# Allegro board OSCILATOR4.brd
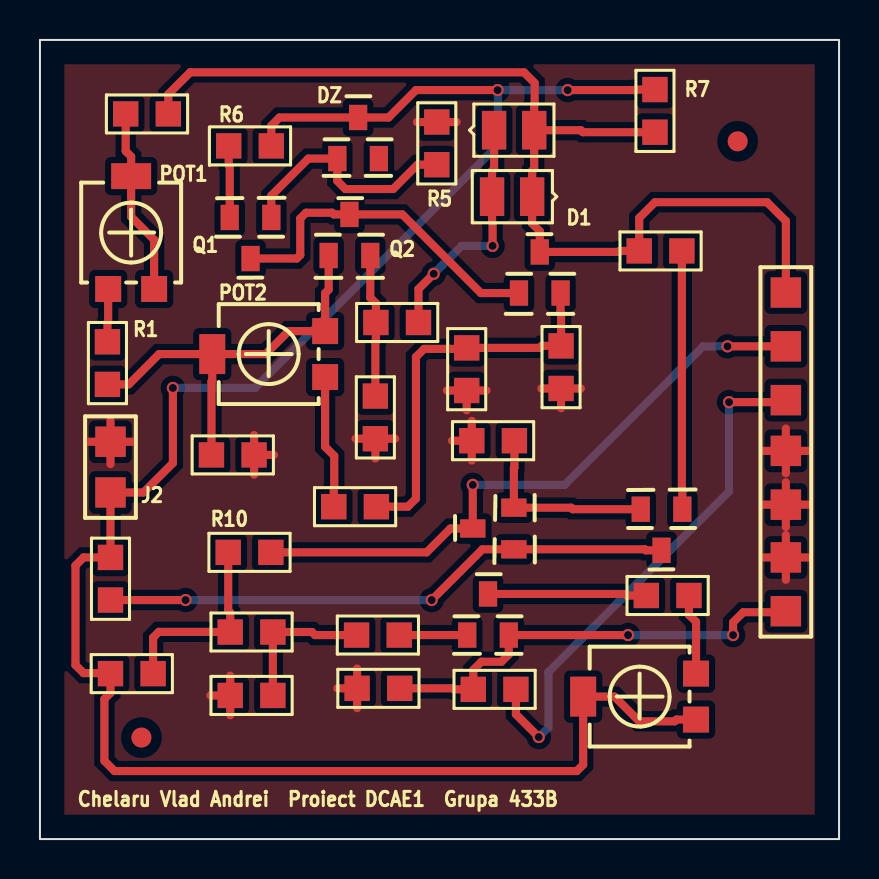
[diagram p0: board, top side]
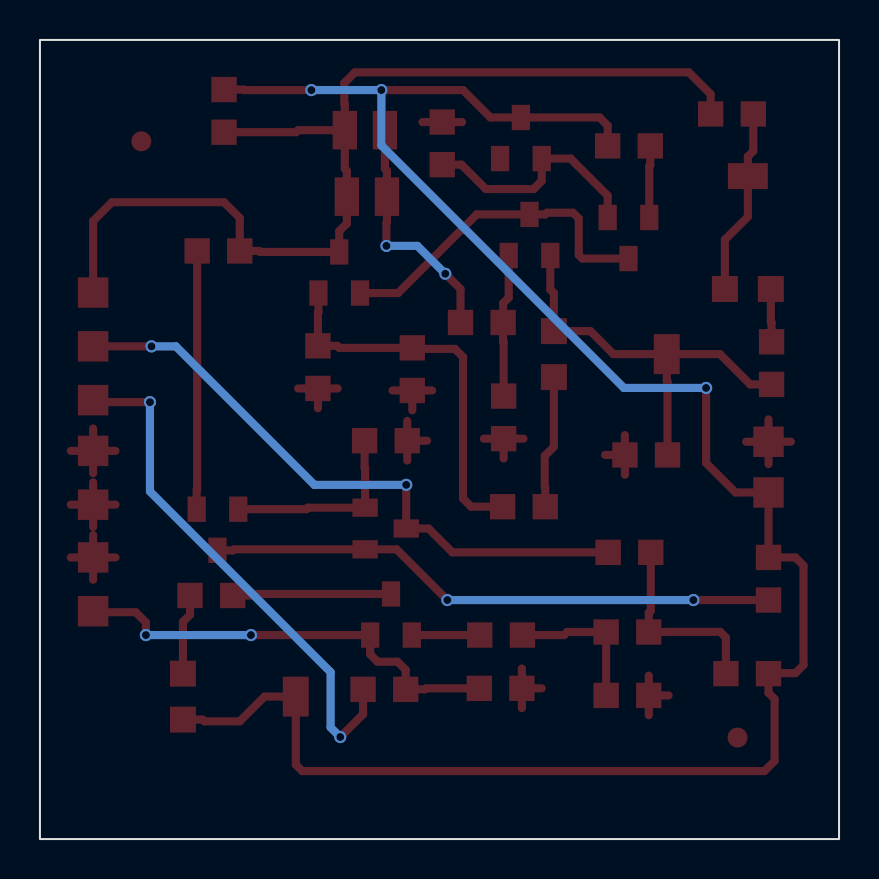
[diagram p1: board, bottom side, seen from below]

Outline 40 x 40 mm; copper layers: TOP, BOTTOM. Coordinates in mm from the lower left corner of the outline.
Outline path: rectangle 0,0 40,40

## Design rules (mm)
nets with their own width: min track width 0.406; nets GND N94313 N94383 N94397 N94495 N94501 N94547 N94637 N94669 N94751 N94757 N94781 N94831 N94841 N94865 N95013 N95079 N95085 N95089 N95235 N95241 N95307 N95407 N945811

## Placement (name value [footprint] x y rotation side)
C1  220n  [SMC0805]  4.29 36.3 0 top
C2  220n  [SMC0805]  10.72 19.23 180 top
C3  4.7u  [SMC0805]  26.09 22.56 90 top
C4  4.7u  [SMC0805]  16.81 25.86 0 top
C5  470n  [SMC0805]  9.53 7.19 0 top
C6  1n  [SMC0805]  21.69 7.49 0 top
D1  D1N4148  [SMD0805]  24.64 32.16 180 top
D2  D1N4148  [SMD0805]  22.73 35.48 0 top
DZ  BZX84C2V7  [TO236AA]  14.88 34.06 270 top
J1  LOAD  [JUMPER2]  37.34 21.97 270 top
J2  VCC  [JUMPER2]  3.53 17.35 90 top
J3  GND  [JUMPER1]  37.34 14.1 0 top
J4  GND  [JUMPER1]  37.34 16.74 0 top
J5  SIN  [JUMPER1]  37.34 27.36 0 top
J6  SQUARE  [JUMPER1]  37.34 24.66 0 top
J7  TRIANGLE  [JUMPER1]  37.34 11.4 0 top
NOREF  -  []  0 0 90 top
NOREF#2  -  []  0 40 0 top
NOREF#3  -  [unnamed#2]  34.92 34.92 0 top
NOREF#4  -  [unnamed#2]  5.08 5.08 0 top
POT1  10k  [TS53YL]  5.71 27.53 270 top
POT2  10k  [TS53YL]  14.27 25.43 0 top
POT3  10k  [TS53YL]  32.84 8.28 0 top
Q1  BC856B  [TO236AA]  11.58 31.11 90 top
Q2  BC846B  [TO236AA]  14.45 29.21 270 top
Q3  BC846B  [TO236AA]  23.98 27.33 270 top
Q4  BC846B  [TO236AA]  32.16 16.51 90 top
Q5  BC846B  [TO236AA]  23.72 14.5 0 top
Q6  BC856B  [TO236AA]  21.39 10.21 270 top
R1  100  [SMR0805]  3.38 22.76 90 top
R2  100  [SMR0805]  16.84 16.64 180 top
R3  3.3k  [SMR0805]  16.79 22.17 270 top
R4  220  [SMR0805]  21.36 22.45 90 top
R5  2.2k  [SMR0805]  19.86 35.89 270 top
R6  2k  [SMR0805]  9.45 34.7 0 top
R7  220  [SMR0805]  30.78 35.38 90 top
R8  150k  [SMR0805]  30 29.44 0 top
R9  1k  [SMR0805]  3.53 11.96 90 top
R10  4.7k  [SMR0805]  11.56 14.35 180 top
R11  1k  [SMR0805]  5.66 8.28 180 top
R12  51  [SMR0805]  21.62 19.94 0 top
R13  4.7k  [SMR0805]  11.66 10.36 180 top
R14  22k  [SMR0805]  17.98 10.21 180 top
R15  1k  [SMR0805]  30.35 12.19 0 top
R16  100k  [SMR0805]  15.88 7.54 0 top

## Library data of the parts
C1-C6 = C
D1 = D1N4148_3
D2 = D1N4148_2
DZ = BZX84C2V7_0
J1 = CON2: User Part Number: ***
J2 = CON2
J3-J7 = CON1: User Part Number: ***
POT1-POT3 = POT
Q1 Q6 = BC856B
Q2-Q5 = BC846B
R1-R16 = R

## Footprints (pads in the part's own frame, mm; a bottom-side part is the same pattern mirrored in y, then rotated)
JUMPER1
  rect 1.524x1.524 smd: 1(0,0)
JUMPER2
  rect 1.524x1.524 smd: 1(0,0) 2(2.54,0)
SMC0805
  rect 1.27x1.27 smd: 1(0,0) 2(2.134,0)
SMD0805
  rect 1.219x1.93 smd: A(2.007,0) C(0,0)
SMR0805
  rect 1.27x1.27 smd: 1(0,0) 2(2.134,0)
TO236AA
  rect 1.27x0.914 smd: 1(0,0) 2(0,2.083) 3(-2.057,1.041)
TS53YL
  rect 1.3x1.3 smd: 1(0,0) 3(0,-2.3)
  rect 1.3x2 smd: 2(-5.65,-1.15)
unnamed#2
  round 1 smd: (0,0)

## Nets
GND: C2.1 C3.1 C5.1 J1.2 J2.2 J3.1 J4.1 R3.2 R4.1 R5.1 R12.1 R16.1
N94313: DZ.3 J2.1 POT3.2(T) POT3.3 R6.2 R7.2 R9.2 R11.2
N94383: C1.2 D1.C D2.A J5.1 Q3.3 R7.1 R8.1
N94397: POT3.1 R15.2
N94495: Q6.3 R15.1
N94501: C1.1 POT1.1 POT1.2(T)
N94547: R10.2 R11.1 R13.2
N94637: C5.2 R13.1 R14.2
N94669: Q4.3 Q5.1 R9.1
N94751: Q1.2(E) R6.1
N94757: C6.1 J7.1 Q6.2(E) R16.2
N94781: POT1.3 R1.2
N94831: J6.1 Q5.3 R10.1
N94841: C6.2 J1.1
N94865: C4.2 D1.A D2.C
N95013: DZ.1 Q1.1 R5.2
N95079: Q4.1 R8.2
N95085: Q4.2(E) Q5.2(E) R12.2
N95089: Q1.3 Q2.3 Q3.1
N95235: C3.2 Q3.2(E) R2.1 R4.2
N95241: C2.2 POT2.1 POT2.2(T) Q2.1 R1.1
N95307: C4.1 Q2.2(E) R3.1
N95407: POT2.3 R2.2
N945811: Q6.1 R14.1

Pads without a net: DZ 2

## Via types
v1: diameter 0.61, hole 0.4, TOP to BOTTOM, 13 vias

## Routing (per net, layer and track width the routed paths; a pad name or vN(x,y) marks a point on that pad's centre or on a via; arc(x,y) is an arc through that point)
GND: length 40.7
  TOP w0.406: 9.53,6.2 C5.1 ; C5.1 9.53,8.18 ; C5.1 8.53,7.19 ; 16.79,19.05 R3.2 ; R3.2 15.8,20.04 ; R3.2 17.78,20.04 ; J2.2 3.53,21.01 ; J2.2 2.41,19.89 ; J2.2 3.53,18.77 ; J2.2 4.65,19.89 ; R12.1 21.62,20.93 ; R12.1 20.62,19.94 ; R12.1 21.62,18.95 ; 36.22,14.1 J3.1 ; J3.1 37.34,15.22 ; J3.1 38.46,14.1 ; J3.1 37.34,12.98 ; 18.87,35.89 R5.1 20.85,35.89 ; R16.1 15.88,8.53 ; R16.1 14.88,7.54 ; R16.1 15.88,6.55 ; 21.36,21.46 R4.1 ; R4.1 20.37,22.45 ; R4.1 22.35,22.45 ; 25.09,22.56 C3.1 ; C3.1 27.08,22.56 ; C3.1 26.09,21.56 ; C2.1 11.71,19.23 ; C2.1 10.72,18.24 ; C2.1 10.72,20.22 ; J4.1 37.34,17.86 ; J4.1 36.22,16.74 ; J4.1 37.34,15.62 ; J4.1 38.46,16.74 ; 37.34,18.31 J1.2 ; J1.2 38.46,19.43 ; J1.2 37.34,20.55 ; J1.2 36.22,19.43
N94313: length 103
  TOP w0.406: v1(22.91,37.49) 18.82,37.49 17.45,36.12 DZ.3 11.99,36.12 11.58,35.71 R6.2 ; R7.2 29.82,37.52 29.79,37.49 v1(26.42,37.49) ; POT3.3 31.86,5.98 31.77,5.89 30,5.89 28.76,7.13 POT3.2 27.19,3.72 26.87,3.4 3.73,3.4 3.23,3.91 3.23,7.01 3.53,7.32 R11.2 3.51,8.31 2.18,8.31 1.78,8.71 1.78,13.69 2.18,14.1 R9.2 J2.1 5.18,17.35 6.65,18.82 v1(6.65,22.58)
  BOTTOM w0.406: v1(6.65,22.58) 10.77,22.58 22.91,34.72 v1(22.91,37.49) v1(26.42,37.49)
N94383: length 53
  TOP w0.406: R7.1 27.18,35.38 27.08,35.48 D2.A ; D2.A 24.74,36.78 24.77,36.8 24.77,37.85 24.23,38.38 7.52,38.38 6.43,37.29 C1.2 ; D2.A 24.74,33.55 24.64,33.45 D1.C 24.64,30.81 25.02,30.43 Q3.3 28.98,29.39 29.03,29.44 R8.1 30,31.09 30.78,31.88 36.4,31.88 37.34,30.94 J5.1
N94397: length 4.1
  TOP w0.406: R15.2 32.49,11.23 32.84,10.87 POT3.1
N94495: length 8
  TOP w0.406: R15.1 29.39,12.19 29.31,12.27 Q6.3
N94501: length 9.4
  TOP w0.406: POT1.1 5.71,30 4.56,31.15 POT1.2 4.56,34.16 4.29,34.44 C1.1
N94547: length 9.8
  TOP w0.406: R11.1 5.66,10.08 5.95,10.37 8.55,10.37 8.56,10.36 R13.2 9.53,11.33 9.42,11.43 R10.2
N94637: length 7.4
  TOP w0.406: C5.2 R13.1 13.61,10.36 13.77,10.21 R14.2
N94669: length 28.7
  TOP w0.406: Q4.3 30.33,14.45 30.28,14.5 Q5.1 22.15,14.5 v1(19.61,11.96) ; R9.1 v1(7.29,11.96)
  BOTTOM w0.406: v1(19.61,11.96) v1(7.29,11.96)
N94751: length 3.6
  TOP w0.406: R6.1 9.45,33.73 9.5,33.68 Q1.2
N94757: length 22.5
  TOP w0.406: v1(34.7,10.21) 34.7,10.85 35.2,11.35 37.29,11.35 J7.1 ; R16.2 20.68,7.54 20.73,7.49 C6.1 21.69,8.47 22.1,8.88 23.1,8.88 23.47,9.25 Q6.2 v1(29.44,10.21)
  BOTTOM w0.406: v1(29.44,10.21) v1(34.7,10.21)
N94781: length 2.7
  TOP w0.406: POT1.3 3.42,25.89 3.38,25.86 R1.2
N94831: length 31.3
  TOP w0.406: R10.1 19.35,14.35 20.55,15.54 Q5.3 v1(21.67,17.73) ; v1(34.42,24.66) J6.1
  BOTTOM w0.406: v1(34.42,24.66) 33.2,24.66 26.26,17.73 v1(21.67,17.73)
N94841: length 26.5
  TOP w0.406: v1(24.97,5.11) 23.83,6.25 C6.2 ; J1.1 37.24,21.87 v1(34.49,21.87)
  BOTTOM w0.406: v1(34.49,21.87) 34.49,17.4 25.45,8.36 25.45,5.59 v1(24.97,5.11)
N94865: length 12.1
  TOP w0.406: D2.C 22.73,33.55 22.63,33.45 D1.A 22.63,30.86 22.66,30.84 v1(22.66,29.69) ; v1(19.71,28.3) 18.95,27.53 C4.2
  BOTTOM w0.406: v1(19.71,28.3) 21.11,29.69 v1(22.66,29.69)
N95013: length 11.9
  TOP w0.406: Q1.1 11.58,32.21 13.44,34.06 DZ.1 14.88,32.94 15.29,32.54 17.68,32.54 18.9,33.76 R5.2
N95079: length 12.9
  TOP w0.406: R8.2 32.13,17.5 32.16,17.48 Q4.1
N95085: length 9.7
  TOP w0.406: Q4.2 26.67,16.51 26.59,16.59 Q5.2 23.72,18.57 23.75,18.59 23.75,19.94
N95089: length 17.1
  TOP w0.406: Q1.3 12.85,29.06 13.03,29.24 13.03,31.06 13.32,31.35 14.62,31.35 14.71,31.27 Q2.3 18.14,31.27 22.07,27.33 Q3.1
N95235: length 19.4
  TOP w0.406: R2.1 18.41,16.64 18.82,17.04 18.82,24.13 19.23,24.54 21.31,24.54 R4.2 25.02,24.59 25.12,24.69 C3.2 26.09,26.34 26.06,26.37 Q3.2
N95241: length 20.9
  TOP w0.406: POT2.2 8.62,22.95 8.59,22.91 C2.2 ; POT2.2 5.96,24.28 4.45,22.76 R1.1 ; POT2.2 11.3,24.28 12.45,25.43 POT2.1 14.27,27.33 14.45,27.51 Q2.1
N95307: length 7.2
  TOP w0.406: R3.1 16.79,24.87 16.81,24.89 C4.1 16.81,26.82 16.54,27.1 Q2.2
N95407: length 6.7
  TOP w0.406: POT2.3 14.27,19.63 14.73,19.18 14.73,17.63 14.71,17.6 R2.2
N945811: length 3.4
  TOP w0.406: R14.1 Q6.1

## Copper pours and planes (outline as drawn; the poured copper is in the pictures)
GND on TOP: 1.22,38.79 1.22,1.22 38.79,1.22 38.79,38.79

## Text on the board
Ref Des/Silkscreen Top: Chelaru Vlad Andrei  Proiect DCAE1  Grupa 433B
XSECTION_CHART: *  SURFACE - AIR 0 MM | L1 TOP CONDUCTOR - COPPER 0.018 MM | *  DIELECTRIC - FR-4 0.732 MM | L2 BOTTOM CONDUCTOR - COPPER 0.018 MM | DESIGN CROSS SECTION CHART | ___________________________ | TOTAL THICKNESS 1.5 MM | 1-2
DIMENSION: FIGURE | FINISHED_SIZE | 0.4 | DRILL CHART: TOP to BOTTOM | ALL UNITS ARE IN MILLIMETERS | PLATED | QTY | 13
